# Altium PCB CAR3.PcbDoc
Units mil, origin at the board's own origin, x right, y up, seen from the top; angles counter-clockwise.
Board outline 6000 x 4000 mil, 2 copper layers (Top Layer, Bottom Layer); 45 components, 40 nets, 152 pads, 0 vias.
Unrouted connection lines stored in the file: 83.
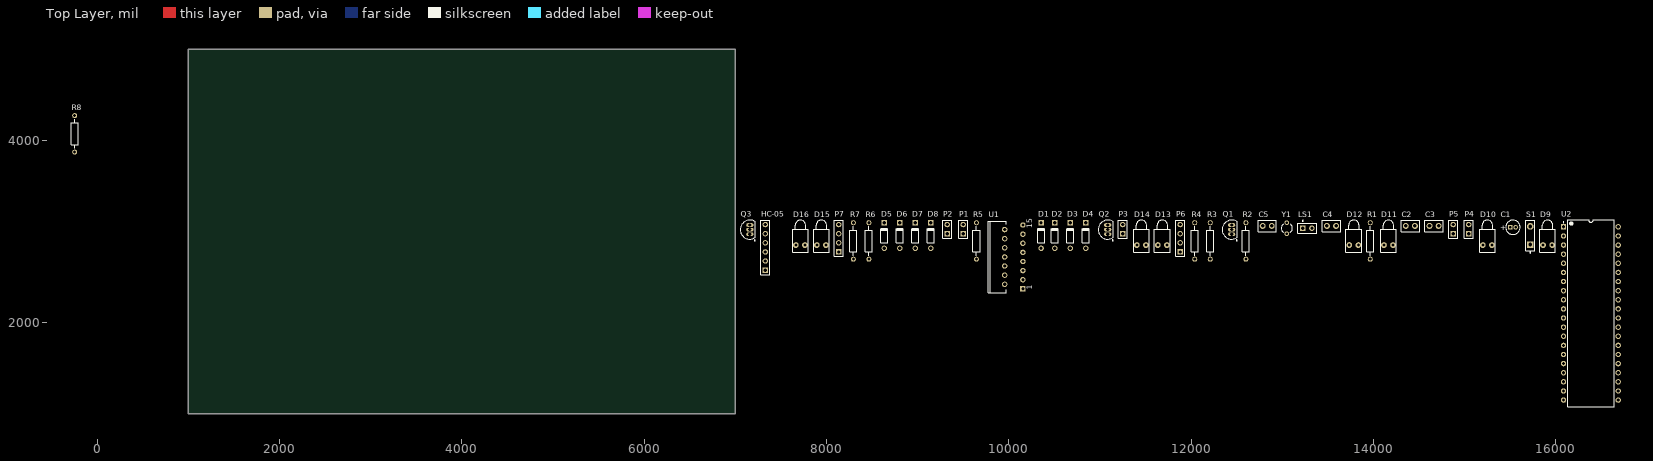
[diagram p0: Top Layer view]
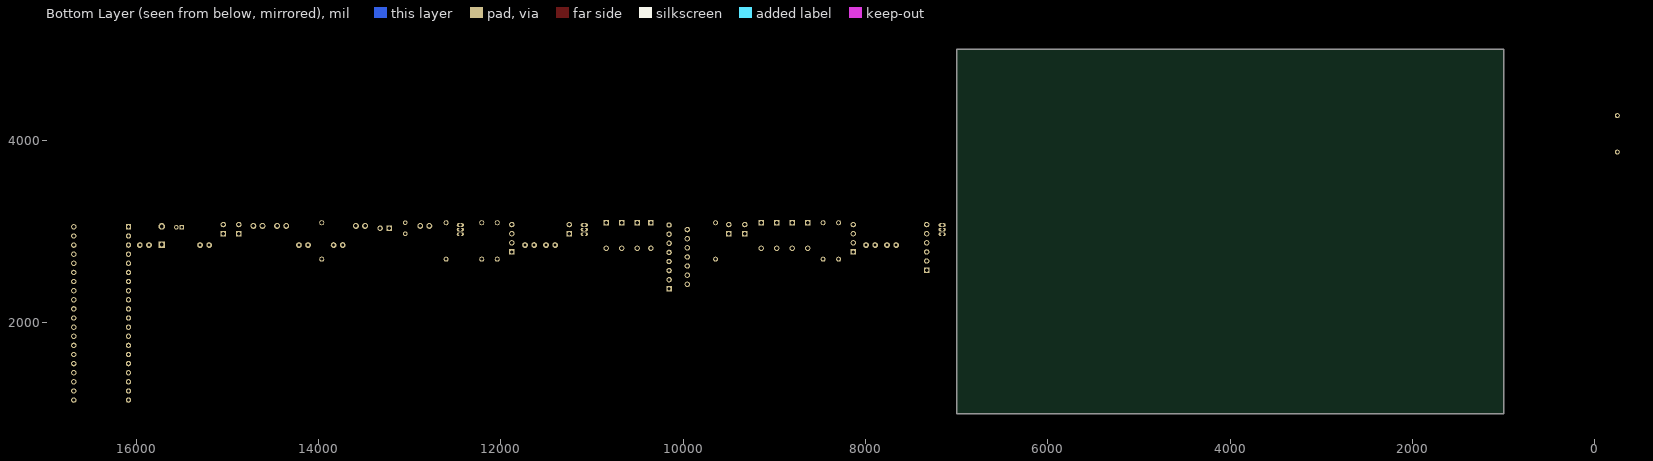
[diagram p1: Bottom Layer view, seen from below]

## Layer stack, top to bottom
Top Layer: signal copper 1.4
Dielectric: dielectric 12.6, FR-4, Dk 4.8
Bottom Layer: signal copper 1.4

## Board outline
1000,1000 7000,1000 7000,5000 1000,5000

## Design rules (kind name [scope] priority, off if disabled: settings)
Clearance [All] p1: gap=10
PolygonConnect [All] p1: connectstyle=Relief reliefconductorwidth=10 reliefentries=4 polygonreliefangle="90 Angle"
RoomDefinition CAR [InComponentClass('CAR')] p1: confinementstyle=ConfineIn formatcopy=TRUE lockcomponents=FALSE outline 7045,1065 16725,1065 16725,3235 7045,3235
RoutingVias [All] p1: holewidth=28 width=50 viastyle="Through Hole" minholewidth=28 minwidth=50 maxholewidth=28 maxwidth=50
SilkscreenOverComponentPads [All] p1: minsilkscreentomaskgap=10
SolderMaskExpansion [All] p1: expansion=4
Width [All] p1: maxlimit=10 minlimit=10 preferedwidth=10
27 further rules are at their usual default settings.

## Components (designator, comment, footprint, x,y, rotation, side; value= is the part's Value field where it differs from the comment)
C1 "Cap Pol1" CAPPR1.5-4x5 15530,3045 r0 top
C2 "Cap" CAPR2.54-5.1x3.2 14405,3060 r0 top
C3 "Cap" CAPR2.54-5.1x3.2 14665,3060 r0 top
C4 "Cap" CAPR2.54-5.1x3.2 13540,3060 r0 top
C5 "Cap" CAPR2.54-5.1x3.2 12835,3060 r0 top
D1 "Diode 1N914" DIO7.1-3.9x1.9 10355,2955 r90 top
D2 "Diode 1N914" DIO7.1-3.9x1.9 10505,2955 r90 top
D3 "Diode 1N914" DIO7.1-3.9x1.9 10675,2955 r90 top
D4 "Diode 1N914" DIO7.1-3.9x1.9 10845,2955 r90 top
D5 "Diode 1N914" DIO7.1-3.9x1.9 8635,2955 r90 top
D6 "Diode 1N914" DIO7.1-3.9x1.9 8805,2955 r90 top
D7 "Diode 1N914" DIO7.1-3.9x1.9 8975,2955 r90 top
D8 "Diode 1N914" DIO7.1-3.9x1.9 9145,2955 r90 top
D9 "" LED-1 15910,2850 r90 top
D10 "" LED-1 15250,2850 r90 top
D11 "" LED-1 14165,2850 r90 top
D12 "" LED-1 13785,2850 r90 top
D13 "RED" LED-1 11685,2850 r90 top
D14 "" LED-1 11455,2850 r90 top
D15 "RED" LED-1 7945,2850 r90 top
D16 "" LED-1 7715,2850 r90 top
HC-05 "Header 6" HDR1X6 7330,2575 r90 top
LS1 "Bell" PIN2 13225,3035 r0 top
P1 "电机1" HDR1X2 9500,2975 r90 top
P2 "电机2" HDR1X2 9325,2975 r90 top
P3 "VS12v" HDR1X2 11250,2975 r90 top
P4 "VCC 5V" HDR1X2 15045,2975 r90 top
P5 "7-12V" HDR1X2 14875,2975 r90 top
P6 "Header 4" HDR1X4 11880,2775 r90 top
P7 "Header 4" HDR1X4 8135,2775 r90 top
Q1 "NPN" BCY-W3 12445,3020 r0 top
Q2 "NPN" BCY-W3 11085,3020 r0 top
Q3 "NPN" BCY-W3 7160,3020 r0 top
R1 "Res2" AXIAL-0.4 13965,2895 r90 top
R2 "10K" AXIAL-0.4 12600,2895 r90 top
R3 "4.7K" AXIAL-0.4 12210,2895 r90 top
R4 "4.7K" AXIAL-0.4 12040,2895 r90 top
R5 "47K" AXIAL-0.4 9645,2895 r90 top
R6 "4.7K" AXIAL-0.4 8465,2895 r90 top
R7 "4.7K" AXIAL-0.4 8295,2895 r90 top
R8 "47K" AXIAL-0.4 -245,4070 r90 top
S1 "SW-PB" SPST-2 15720,2955 r90 top
U1 "L298N" Multiwatt15V 10055,2720 r90 top
U2 "STC89C52" DIP-40 16385,2100 r0 top
Y1 "XTAL" BCY-W2/D3.1 13050,3035 r0 top

## Footprints (in the part's own frame and the unit in brackets; to place one, negate y for a bottom-side part, rotate by r counter-clockwise, add the part's x,y. Pads: shape width x height; smd on the part's side, far side on the other; paste and mask are expansions set on the pad)
AXIAL-0.4 [mm] "Axial Device, Thru-Hole; 2 Leads; 0.4 in Pin Spacing"
  round 1.4 hole 0.85: 1(-5.08,0) 2(5.08,0)
  silkscreen extent -4.06,-1.02 4.06,1.02
BCY-W2/D3.1 [mm] "Crystal, Thru-Hole; 2 Leads; Body 3.1 x 8.2 mm (Dia.xH)"
  round 1.3 hole 0.7: 1(0,1.55) 2(0,-1.55)
  silkscreen extent -1.55,-1.19 1.55,1.17
BCY-W3 [mm] "TO, Flat Index; 3 In-Line, Axial Leads; Body Dia. 4.8mm; Leads 0.55 x 0.51 mm (max)"
  oval 2x1 hole 0.9: 1(0,-1.27) 2(0,0) 3(0,1.27)
  silkscreen extent -2.65,-3.13 1.52,2.65, body extent -2.66,-2.66 1.52,2.66, height 5.33
CAPPR1.5-4x5 [mm] "Capacitor, Electrolytic, Radial; Body 4 x 5 mm (Dia.xH typ); Pin Spacing 1.5 mm (typ)"
  rect 1.25x1.25 hole 0.75: 1(-0.75,0)
  round 1.25 hole 0.75: 2(0.75,0)
  silkscreen extent -2,-2 2,2
CAPR2.54-5.1x3.2 [mm] "Capacitor, Ceramic, Thru-Hole, Dipped Radial; Body 5.1 x 3.2 mm (WxT) Pin Spacing 2.54 mm (typ)"
  round 1.65 hole 1: 1(-1.27,0) 2(1.27,0)
  silkscreen extent -2.55,-1.6 2.55,1.6
DIO7.1-3.9x1.9 [mm] "Diode, Axial; Body 3.8 x 1.9 mm (LxDia. max), Lead Dia. 0.53 mm (max)"
  round 1.5 hole 0.9: 1(-3.55,0)
  rect 1.5x1.5 hole 0.9: 2(3.55,0)
  silkscreen extent -1.95,-0.95 2.05,0.95
DIP-40 [mm] "DIP, 40-Pin, Row Spacing 15.24 mm, Pitch 2.54 mm"
  rect 1.5x1.5 hole 0.9: 1(-7.62,24.13)
  round 1.5 hole 0.9: 2(-7.62,21.59) 3(-7.62,19.05) 4(-7.62,16.51) 5(-7.62,13.97) 6(-7.62,11.43) 7(-7.62,8.89) 8(-7.62,6.35) 9(-7.62,3.81) 10(-7.62,1.27) 11(-7.62,-1.27) 12(-7.62,-3.81) 13(-7.62,-6.35) 14(-7.62,-8.89) 15(-7.62,-11.43) 16(-7.62,-13.97) 17(-7.62,-16.51) 18(-7.62,-19.05) 19(-7.62,-21.59) 20(-7.62,-24.13) 21(7.62,-24.13) 22(7.62,-21.59) 23(7.62,-19.05) 24(7.62,-16.51) 25(7.62,-13.97) 26(7.62,-11.43) 27(7.62,-8.89) 28(7.62,-6.35) 29(7.62,-3.81) 30(7.62,-1.27) 31(7.62,1.27) 32(7.62,3.81) 33(7.62,6.35) 34(7.62,8.89) 35(7.62,11.43) 36(7.62,13.97) 37(7.62,16.51) 38(7.62,19.05) 39(7.62,21.59) 40(7.62,24.13)
  silkscreen extent -7.74,-26.05 6.45,26.05, body extent -7.42,-26.03 7.42,26.03, height 5.08
HDR1X2 [mm] "Connector; Header; 2 Position"
  rect 1.5x1.5 hole 0.9: 1(0,0)
  round 1.5 hole 0.9: 2(2.54,0)
  silkscreen extent -1.27,-1.27 3.81,1.27
HDR1X4 [mm] "Connector; Header; 4 Position"
  rect 1.5x1.5 hole 0.9: 1(0,0)
  round 1.5 hole 0.9: 2(2.54,0) 3(5.08,0) 4(7.62,0)
  silkscreen extent -1.27,-1.27 8.89,1.27
HDR1X6 [mm] "Connector; Header; 6 Position"
  rect 1.5x1.5 hole 0.9: 1(0,0)
  round 1.5 hole 0.9: 2(2.54,0) 3(5.08,0) 4(7.62,0) 5(10.16,0) 6(12.7,0)
  silkscreen extent -1.27,-1.27 13.97,1.27
LED-1 [mm] "Typical RED GaAs LED; 2 Leads"
  round 1.6 hole 0.8: 1(0,1.27) 2(0,-1.27)
  silkscreen extent -2,-2.2 6.95,2.2
Multiwatt15V [mm] "TO, Thru-Hole, Vertical, Heatsink Mounted; 15 Bent Staggered Leads; Pitch 1.27 mm"
  rect 1.5x1.5 hole 0.9: 1(-8.89,-2.54)
  round 1.5 hole 0.9: 2(-7.62,2.54) 3(-6.35,-2.54) 4(-5.08,2.54) 5(-3.81,-2.54) 6(-2.54,2.54) 7(-1.27,-2.54) 8(0,2.54) 9(1.27,-2.54) 10(2.54,2.54) 11(3.81,-2.54) 12(5.08,2.54) 13(6.35,-2.54) 14(7.62,2.54) 15(8.89,-2.54)
  silkscreen extent -10,2.09 10,7.09
PIN2 [mm] "Photosensitive Diode; 2 Leads"
  rect 1.5x1.5 hole 0.9: 1(0,0)
  round 1.5 hole 0.9: 2(2.54,0)
  silkscreen extent -1.4,-1.4 3.94,2.17
SPST-2 [mm] "Circuit Breaker; 2 Leads"
  rect 1.85x1.85 hole 1.1: 1(-2.54,0)
  round 1.85 hole 1.1: 2(2.54,0)
  silkscreen extent -4.89,-1.27 4.28,1.27

## Part data
C1: "Polarized Capacitor (Radial)"
C2 C3 C4 C5: "Capacitor"
D1 D2 D3 D4 D5 D6 D7 D8: "High Conductance Fast Diode"
D9 D10 D11 D12 D14 D16: library part LED0, "Typical INFRARED GaAs LED"
D13 D15: library part LED_RCV
HC-05: "Header, 6-Pin"
LS1: "Electrical Bell"
P1 P2 P3 P4 P5: library part "Header 2", "Header, 2-Pin"
P6 P7: "Header, 4-Pin"
Q1 Q2 Q3: "NPN Bipolar Transistor"
R1: "Resistor"
R2 R3 R4 R5 R6 R7 R8: library part Res2, "Resistor"
S1: "Switch"
U1: "Dual Full Bridge Driver"
Y1: "Crystal Oscillator"

## Nets (pads, with @x,y where several pads share a name; then routed paths per layer and width w, separated by ;. In a path a pad name is that pad's centre, name@x,y a point inside that pad or via, vN(x,y) a via of type N, cw(c..) or ccw(c..) an arc to the next point about the centre after c; other vN are vias at no path point)
5: U1.5 U2.23
6: U1.6 U2.24
7: U1.7 U2.25
10: U1.10 U2.26
11: U1.11 U2.27
12: U1.12 U2.28
BELL: R2.2
GND: C2.1 C3.1 C4.1 C5.1 D5.1 D6.1 D7.1 D8.1 HC-05.4 P3.1 P4.2 P5.1 Q1.3 Q2.3 Q3.3 R1.1 R5.1 R8.1 U1.1 U1.8 U1.15 U2.20
K1: HC-05.3 U2.10
LED0: D14.2 P6.3
LED0+: P6.4
LED1: D16.2 P7.3 U2.38
LED1+: P7.4
LED3: D9.2
LED4: D10.2 U2.36
LED5: D11.2
LED6: D12.2
NetC1_2: C1.2 R1.2 S1.1 U2.9
NetC3_2: C3.2 P4.1
NetC4_2: C4.2 U2.18 Y1.1
NetC5_2: C5.2 U2.19 Y1.2
NetD1_1: D1.1 D5.2 P1.1 U1.2
NetD2_1: D2.1 D6.2 P1.2 U1.3
NetD3_1: D3.1 D7.2 P2.1 U1.13
NetD4_1: D4.1 D8.2 P2.2 U1.14
NetD14_1: D14.1 R3.1
NetD16_1: D16.1 R6.1
NetLS1_1: LS1.1 Q1.1
NetQ1_2: Q1.2 R2.1
P31: HC-05.2 U2.11
P32: HC-05.6 U2.1
RED0: Q2.1 R4.1
RED0+: P6.2
RED0-: P6.1 Q2.2 R5.2
RED1: Q3.1 R7.1
RED1+: P7.2
RED1-: P7.1 Q3.2 R8.2
VBAT: P5.2
VCC: C1.1 C2.2 D9.1 D10.1 D11.1 D12.1 HC-05.5 LS1.2 R3.2 R4.2 R6.2 R7.2 S1.2 U1.9 U2.40
VM: D1.2 D2.2 D3.2 D4.2 P3.2 U1.4
pads on no net: D13.1 D13.2 D15.1 D15.2 HC-05.1 U2.2 U2.3 U2.4 U2.5 U2.6 U2.7 U2.8 U2.12 U2.13 U2.14 U2.15 U2.16 U2.17 U2.21 U2.22 U2.29 U2.30 U2.31 U2.32 U2.33 U2.34 U2.35 U2.37 U2.39

## Text inside footprints (layer, text, board x,y; h text height)
C1: Top Overlay "+" at 15393.19,3015.47 h59.06
U1: Top Overlay "15" at 10258.35,3032.6 h59.06 r90; Top Overlay "1" at 10258.35,2360.94 h59.06 r90